# EAGLE board DrinkbotPCB (EAGLE 6.1)

Size 130.79 x 60.63 mm. Coordinates in mm from the lower left corner, seen from the top.
Outline: 0,0 130.79,0 130.79,60.63 0,60.63 0,0
Copper layers (1*16): Top 0.035mm / dielectric 1.5mm / Bottom 0.035mm
Design rules: minimum track width 10mil, minimum drill 24mil, track to track 8mil, track to pad 8mil, pad to pad 8mil, via to via 8mil, smd to smd 8mil, copper to edge 40mil, drill to drill 8mil, minimum pad ring 10mil, minimum via ring 8mil, stop-mask expansion 4mil, vias tented up to drill 0mil, thermal gap 10mil

## Footprints (pad centres in the part's own frame; a part is rotated, then mirrored left to right if it is on the bottom)
DIODE-1N4001 = drill 1 pad 1.981: A -5.08,0; C 5.08,0
2X13 = drill 1.016 octagon: 1 -15.24,-1.27; 2 -15.24,1.27; 3 -12.7,-1.27; 4 -12.7,1.27; 5 -10.16,-1.27; 6 -10.16,1.27; 7 -7.62,-1.27; 8 -7.62,1.27; 9 -5.08,-1.27; 10 -5.08,1.27; 11 -2.54,-1.27; 12 -2.54,1.27; 13 0,-1.27; 14 0,1.27; 15 2.54,-1.27; 16 2.54,1.27; 17 5.08,-1.27; 18 5.08,1.27; 19 7.62,-1.27; 20 7.62,1.27; 21 10.16,-1.27; 22 10.16,1.27; 23 12.7,-1.27; 24 12.7,1.27; 25 15.24,-1.27; 26 15.24,1.27
TO220-IGO = drill 1 pad 1.88: GND 0,0; OUT 2.54,0 | drill 1 pad 1.88 square: IN -2.54,0
POWER_JACK_PTH = drill 2.997 pad 4.318: GND 0,7.7; GNDBREAK 4.7,10.7; PWR 0,13.7
TO220V = drill 1.016 long: 1 -2.54,0; 2 0,0; 3 2.54,0
AXIAL-0.4 = drill 0.9 pad 1.88: P$1 -5.08,0; P$2 5.08,0
RJ45-8 = drill 1 pad 1.88 square: 1 -4.445,6.35 | drill 1 pad 1.88: 2 -3.175,8.89; 3 -1.905,6.35; 4 -0.635,8.89; 5 0.635,6.35; 6 1.905,8.89; 7 3.175,6.35; 8 4.445,8.89 | hole 3.2: -5.715,0; 5.715,0

## Placement (x,y rotation side)
D1  1N4007  [DIODE-1N4001]  7.62,15.24 180 top
D2  1N4007  [DIODE-1N4001]  25.4,15.24 180 top
D3  1N4007  [DIODE-1N4001]  41.91,15.24 180 top
D4  1N4007  [DIODE-1N4001]  58.42,15.24 180 top
D5  1N4007  [DIODE-1N4001]  73.66,15.24 180 top
D6  1N4007  [DIODE-1N4001]  90.17,15.24 180 top
D7  1N4007  [DIODE-1N4001]  106.68,15.24 180 top
D8  1N4007  [DIODE-1N4001]  123.19,15.24 180 top
GPIO_HEADER1  RPI_GPIO_HEADER  [2X13]  21.59,55.88 0 top
IC1  L7805  [TO220-IGO]  111.76,49.53 270 top
J1  POWER_JACKPTH  [POWER_JACK_PTH]  125.73,63.5 180 top
Q1  MOSFET-NCHANNELFQP30N06L  [TO220V]  7.62,21.59 0 top
Q2  MOSFET-NCHANNELFQP30N06L  [TO220V]  25.4,21.59 0 top
Q3  MOSFET-NCHANNELFQP30N06L  [TO220V]  41.91,20.32 0 top
Q4  MOSFET-NCHANNELFQP30N06L  [TO220V]  58.42,20.32 0 top
Q5  MOSFET-NCHANNELFQP30N06L  [TO220V]  73.66,20.32 0 top
Q6  MOSFET-NCHANNELFQP30N06L  [TO220V]  90.17,20.32 0 top
Q7  MOSFET-NCHANNELFQP30N06L  [TO220V]  106.68,20.32 0 top
Q8  MOSFET-NCHANNELFQP30N06L  [TO220V]  123.19,20.32 0 top
R1  10k  [AXIAL-0.4]  7.62,27.94 0 top
R2  10k  [AXIAL-0.4]  25.4,27.94 0 top
R3  10k  [AXIAL-0.4]  43.18,27.94 0 top
R4  10k  [AXIAL-0.4]  58.42,27.94 0 top
R5  10k  [AXIAL-0.4]  73.66,27.94 0 top
R6  10k  [AXIAL-0.4]  90.17,26.67 0 top
R7  10k  [AXIAL-0.4]  106.68,26.67 0 top
R8  10k  [AXIAL-0.4]  123.19,26.67 0 top
UNI3  RJ45-8PTH  [RJ45-8]  57.15,2.54 0 top
UNIT0  RJ45-8PTH  [RJ45-8]  7.62,2.54 0 top
UNIT1  RJ45-8PTH  [RJ45-8]  24.13,2.54 0 top
UNIT2  RJ45-8PTH  [RJ45-8]  40.64,2.54 0 top
UNIT4  RJ45-8PTH  [RJ45-8]  73.66,2.54 0 top
UNIT5  RJ45-8PTH  [RJ45-8]  90.17,2.54 0 top
UNIT6  RJ45-8PTH  [RJ45-8]  106.68,2.54 0 top
UNIT7  RJ45-8PTH  [RJ45-8]  123.19,2.54 0 top

## Library data of the parts
D1-D8 = SparkFun-DiscreteSemi
GPIO_HEADER1 = rpi-header
IC1 = SparkFun-PowerIC
J1 UNI3 UNIT0 UNIT1 UNIT2 UNIT4-UNIT7 = SparkFun-Connectors
Q1-Q8 = SparkFun-DiscreteSemi; PROD_ID: TRANS-10060
R1-R8 = SparkFun-Passives

## Nets
+3V3: GPIO_HEADER1.1 GPIO_HEADER1.17
+5V: GPIO_HEADER1.2 GPIO_HEADER1.4 IC1.OUT
GND: GPIO_HEADER1.6 GPIO_HEADER1.9 GPIO_HEADER1.14 GPIO_HEADER1.20 GPIO_HEADER1.25 IC1.GND J1.GND J1.GNDBREAK Q1.3 Q2.3 Q3.3 Q4.3 Q5.3 Q6.3 Q7.3 Q8.3 R1.P$2 R2.P$2 R3.P$2 R4.P$2 R5.P$2 R6.P$2 R7.P$2 R8.P$2
PUMP0: GPIO_HEADER1.11 Q1.1 R1.P$1
PUMP1: GPIO_HEADER1.12 Q2.1 R2.P$1
PUMP2: GPIO_HEADER1.13 Q3.1 R3.P$1
PUMP3: GPIO_HEADER1.15 Q4.1 R4.P$1
PUMP4: GPIO_HEADER1.16 Q5.1 R5.P$1
PUMP5: GPIO_HEADER1.18 Q6.1 R6.P$1
PUMP6: GPIO_HEADER1.22 Q7.1 R7.P$1
PUMP7: GPIO_HEADER1.7 Q8.1 R8.P$1
VIN12: D1.C D2.C D3.C D4.C D5.C D6.C D7.C D8.C IC1.IN J1.PWR UNI3.1 UNIT0.1 UNIT1.1 UNIT2.1 UNIT4.1 UNIT5.1 UNIT6.1 UNIT7.1
VOUTPUMP0: D1.A Q1.2 UNIT0.8
VOUTPUMP1: D2.A Q2.2 UNIT1.8
VOUTPUMP2: D3.A Q3.2 UNIT2.8
VOUTPUMP3: D4.A Q4.2 UNI3.8
VOUTPUMP4: D5.A Q5.2 UNIT4.8
VOUTPUMP5: D6.A Q6.2 UNIT5.8
VOUTPUMP6: D7.A Q7.2 UNIT6.8
VOUTPUMP7: D8.A Q8.2 UNIT7.8

## Tracks (layer width: path | path; a pad name or v marks a point on that pad's centre or on a via)
+3V3  (1 unrouted)
+5V  (2 unrouted)
GND  (23 unrouted)
PUMP0  (2 unrouted)
PUMP1  (2 unrouted)
PUMP2  (2 unrouted)
PUMP3  (2 unrouted)
PUMP4  (2 unrouted)
PUMP5  (2 unrouted)
PUMP6  (2 unrouted)
PUMP7  (2 unrouted)
VIN12  (17 unrouted)
VOUTPUMP0  (2 unrouted)
VOUTPUMP1  (2 unrouted)
VOUTPUMP2  (2 unrouted)
VOUTPUMP3  (2 unrouted)
VOUTPUMP4  (2 unrouted)
VOUTPUMP5  (2 unrouted)
VOUTPUMP6  (2 unrouted)
VOUTPUMP7  (2 unrouted)